# Altium PCB PlacaAudio.PcbDoc
Units mm, origin at the board's own origin, x right, y up, seen from the top; angles counter-clockwise.
Board outline 100 x 50 mm, 2 copper layers (Top Layer, Bottom Layer); 37 components, 21 nets, 89 pads, 18 vias.
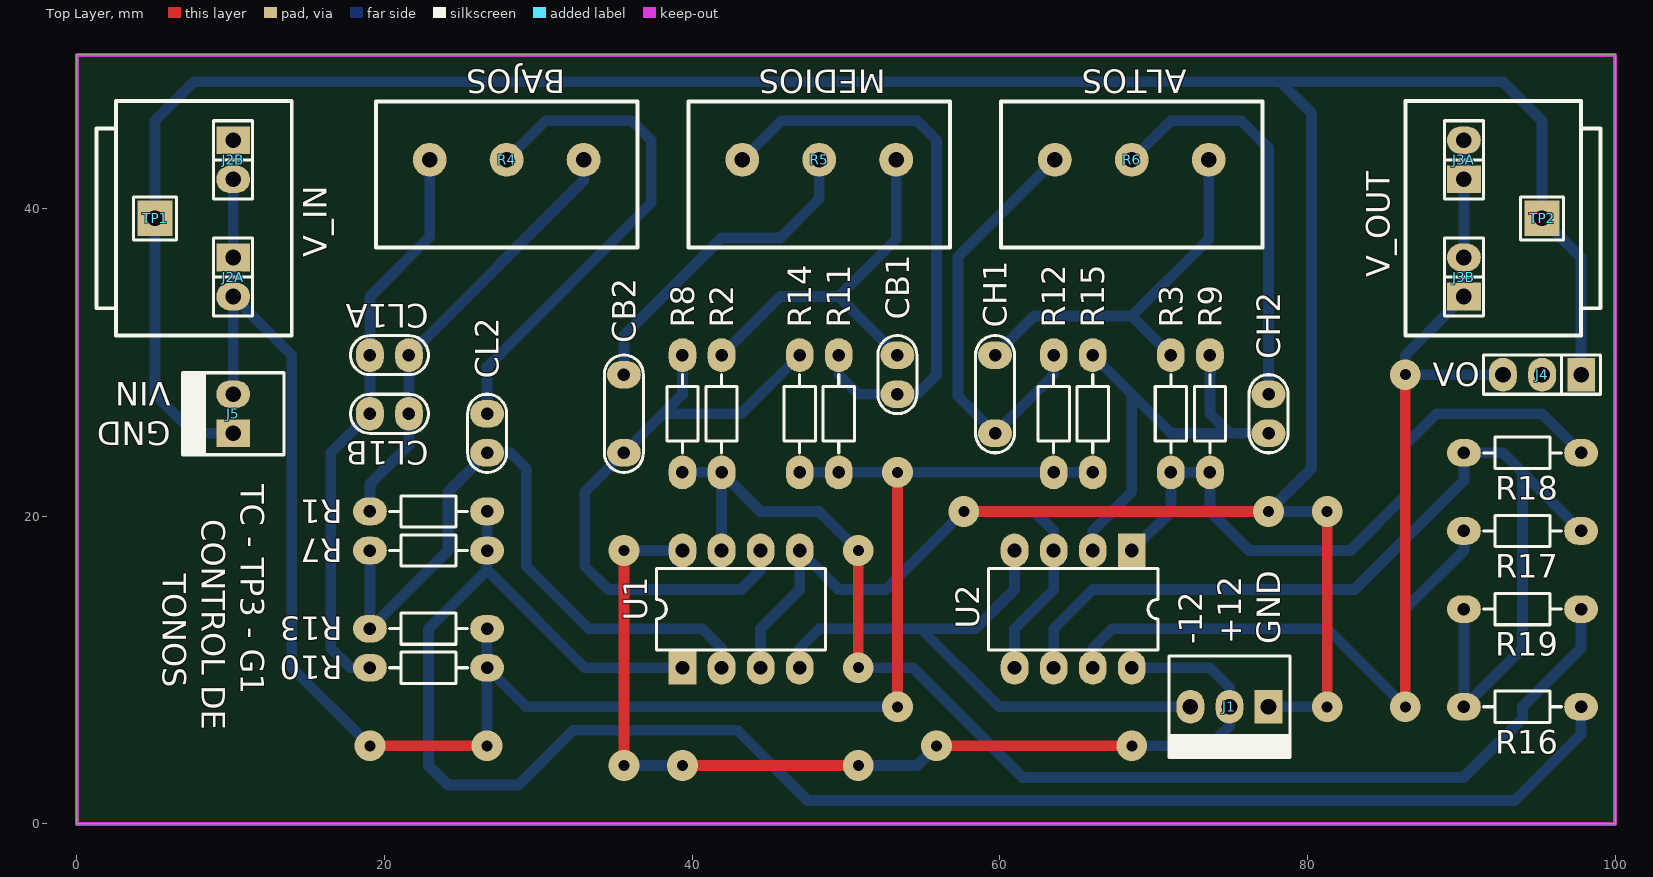
[diagram p0: Top Layer view]
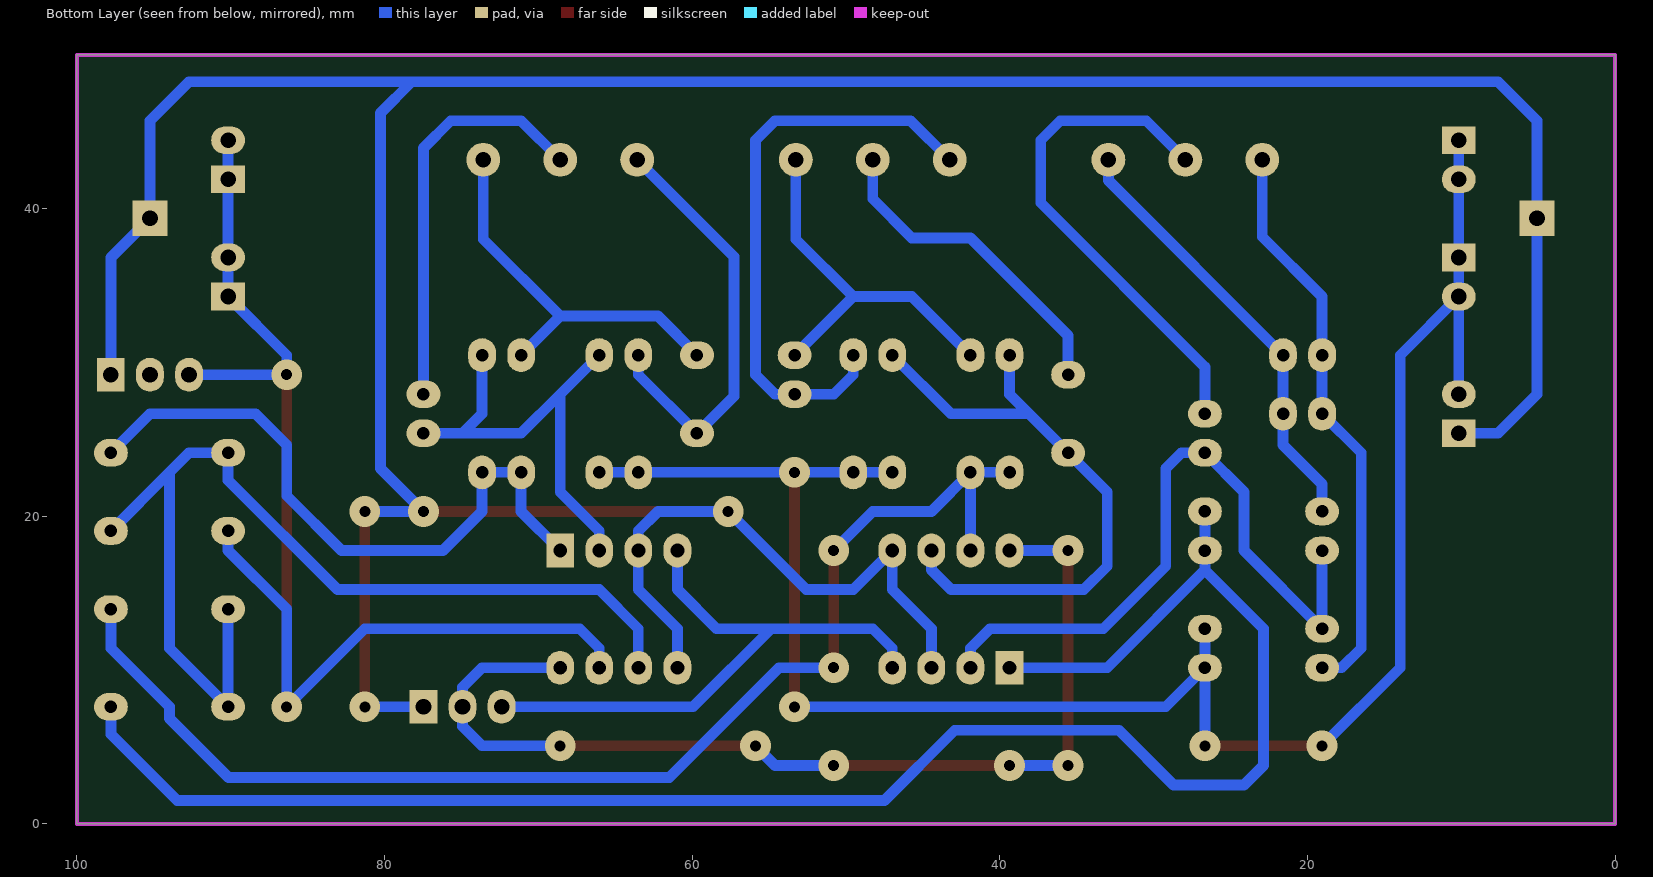
[diagram p1: Bottom Layer view, seen from below]
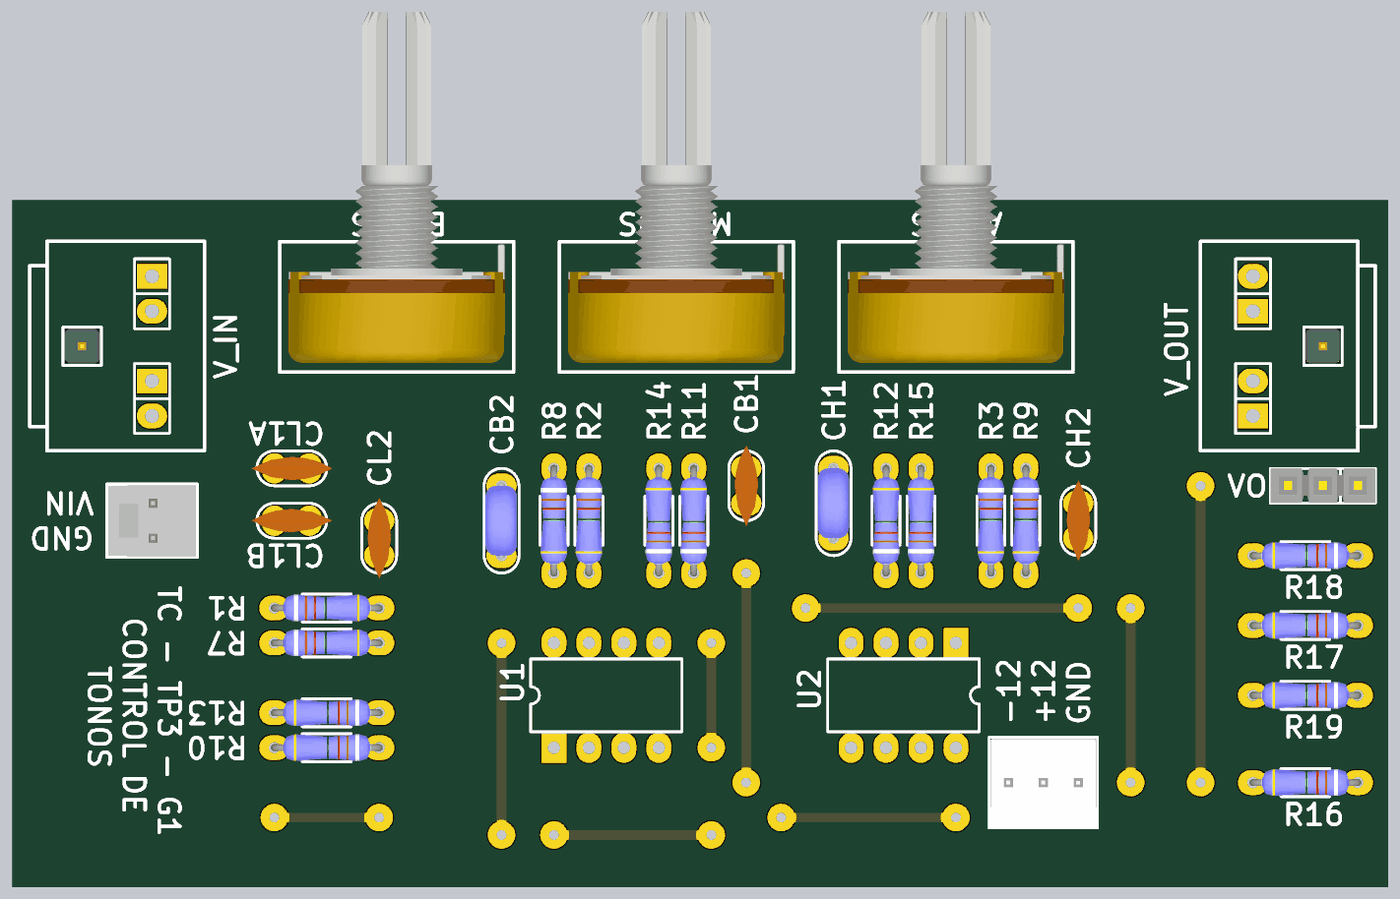
[diagram p2: 3D render of the assembled board from above, using the file's embedded part models]

## Layer stack, top to bottom
Top Solder: solder mask 0.0102, Solder Resist, Dk 3.5
Top Layer: signal copper 0.0356
Dielectric 1: dielectric 0.32, FR-4, Dk 4.8
Bottom Layer: signal copper 0.0356
Bottom Solder: solder mask 0.0102, Solder Resist, Dk 3.5

## Board outline
0,0 0,50 100,50 100,0

## Design rules (kind name [scope] priority, off if disabled: settings)
Clearance [All] p1: gap=0.7
PolygonConnect [All] p1: connectstyle=Relief reliefconductorwidth=0.254 reliefentries=4 polygonreliefangle="90 Angle" airgapwidth=0.254
RoutingVias [All] p1: holewidth=0.711 width=2 viastyle="Through Hole" minholewidth=0.711 minwidth=2 maxholewidth=0.711 maxwidth=2
SolderMaskExpansion [All] p1: expansion=0.102
Width [All] p1: maxlimit=0.7 minlimit=0.7 preferedwidth=0.7
30 further rules are at their usual default settings.

## Components (designator, comment, footprint, x,y, rotation, side; value= is the part's Value field where it differs from the comment)
CB1 "100n" CAP100 53.34,29.21 r270 top
CB2 "10n" CAP200 35.56,26.67 r270 top
CH1 "10n" CAP200 59.69,27.94 r270 top
CH2 "1n" CAP100 77.47,26.67 r270 top
CL1A "330n" CAP100 20.32,30.48 r180 top
CL1B "680n" CAP100 20.32,26.67 r0 top
CL2 "100n" CAP100 26.67,25.4 r270 top
J1 "FUENTE" MOLEX3 77.47,7.62 r180 top
J2A "AUDIO_INA" SIP2 10.16,35.56 r270 top
J2B "AUDIO_INB" SIP2 10.16,43.18 r270 top
J3A "AUDIO_OUTA" SIP2 90.17,43.18 r90 top
J3B "AUDIO_OUTB" SIP2 90.17,35.56 r90 top
J4 "VO_PIN" SIP3 95.25,29.21 r180 top
J5 "VIN_TEST" MOLEX2 10.16,25.4 r90 top
R1 "560" RES300 19.05,20.32 r0 top
R2 "560" RES300 41.91,30.48 r270 top
R3 "560" RES300 71.12,30.48 r270 top
R4 "10K" POTENCIOMETRO 27.94,43.18 r180 top
R5 "10K" POTENCIOMETRO 48.26,43.18 r180 top
R6 "10K" POTENCIOMETRO 68.58,43.18 r180 top
R7 "100K" RES300 19.05,17.78 r0 top
R8 "100K" RES300 39.37,30.48 r270 top
R9 "100K" RES300 73.66,30.48 r270 top
R10 "560" RES300 26.67,10.16 r180 top
R11 "560" RES300 49.53,22.86 r90 top
R12 "560" RES300 63.5,22.86 r90 top
R13 "100K" RES300 26.67,12.7 r180 top
R14 "100K" RES300 46.99,22.86 r90 top
R15 "100K" RES300 66.04,22.86 r90 top
R16 "2.7K" RES300 97.79,7.62 r180 top
R17 "1.5K" RES300 97.79,19.05 r180 top
R18 "2.7K" RES300 97.79,24.13 r180 top
R19 "2.7K" RES300 97.79,13.97 r180 top
TP1 "IN_GND" TPTH 5.08,39.37 r90 top
TP2 "OUT_GND" TPTH 95.25,39.37 r270 top
U1 "TL082ACN" DIP8 43.18,13.97 r0 top
U2 "TL082ACN" DIP8 64.77,13.97 r180 top

## Footprints (in the part's own frame and the unit in brackets; to place one, negate y for a bottom-side part, rotate by r counter-clockwise, add the part's x,y. Pads: shape width x height; smd on the part's side, far side on the other; paste and mask are expansions set on the pad)
CAP100 [mm]
  oval 1.8x2.2 hole 0.813: 1(-1.27,0) 2(1.27,0)
  silkscreen extent -2.54,-1.27 2.54,1.27, body extent -2.92,-0.84 2.92,0.86, height 6.12
CAP200 [mm]
  oval 1.8x2.2 hole 0.813: 1(-2.54,0) 2(2.54,0)
  silkscreen extent -3.81,-1.27 3.81,1.27, body extent -2.79,-1.17 2.79,1.12, height 6.24
DIP8 [mm] "DIP; 8 Leads; Row Spacing 7.62 mm; Pitch 2.54 mm"
  rect 1.8x2.2 hole 0.9: 1(-3.81,-3.81)
  oval 1.8x2.2 hole 0.9: 2(-1.27,-3.81) 3(1.27,-3.81) 4(3.81,-3.81) 5(3.81,3.81) 6(1.27,3.81) 7(-1.27,3.81) 8(-3.81,3.81)
  silkscreen extent -5.5,-2.65 5.5,2.65
MOLEX2 [mm]
  rect 1.8x2.2 hole 1.016: 1(0,0)
  oval 1.8x2.2 hole 1.016: 2(2.54,0)
  silkscreen extent -1.4,-3.3 3.94,3.3, body extent -1.27,-3.17 3.81,3.18, height 10.74
MOLEX3 [mm]
  rect 1.8x2.2 hole 1.016: 1(0,0)
  oval 1.8x2.2 hole 1.016: 2(2.54,0) 3(5.08,0)
  silkscreen extent -1.4,-3.3 6.48,3.3, body extent -1.27,-3.17 6.35,3.18, height 10.74
POTENCIOMETRO [mm]
  round 2.2 hole 1: 1(-5,0) 2(0,0) 3(5,0)
  silkscreen extent -8.5,-3.8 8.5,5.7, body extent -7.87,-20.53 7.87,5.03, height 20.12
RES300 [mm]
  oval 2.2x1.8 hole 0.813: 1(0,0) 2(7.62,0)
  silkscreen extent 1.27,-1.02 6.35,1.02, body extent -0.25,-0.97 7.87,0.97, height 2.01
SIP2 [mm]
  rect 1.8x2.2 hole 1.016: 1(-1.27,0)
  oval 1.8x2.2 hole 1.016: 2(1.27,0)
  silkscreen extent -2.54,-1.27 2.54,1.27
SIP3 [mm]
  rect 1.8x2.2 hole 1.016: 1(-2.54,0)
  oval 1.8x2.2 hole 1.016: 2(0,0) 3(2.54,0)
  silkscreen extent -3.81,-1.27 3.81,1.27, body extent -3.81,-1.3 3.81,1.24, height 8.38
TPTH [mm]
  rect 2.3x2.3 hole 1.016: 1(0,0)
  silkscreen extent -1.4,-1.4 1.4,1.4, body extent -1.27,-1.27 1.27,1.27, height 6.04

## Part data
CB1 CB2 CH1 CH2 CL1A CL1B CL2: library part CAP
J1: library part MOLEX3
J2A J2B J3A J3B: library part CON2
J4: library part CON3
J5: library part MOLEX2
R1 R2 R3 R7 R8 R9 R10 R11 R12 R13 R14 R15 R16 R17 R18 R19: library part RES
R4 R5 R6: library part POTENCIOMETRO
TP1 TP2: library part TP
U1 U2: "General-Purpose J-FET Dual Operational Amplifier"

## Via types
v1: diameter 2, hole 0.711, Top Layer to Bottom Layer, 18 vias

## Nets (pads, with @x,y where several pads share a name; then routed paths per layer and width w, separated by ;. In a path a pad name is that pad's centre, name@x,y a point inside that pad or via, vN(x,y) a via of type N, cw(c..) or ccw(c..) an arc to the next point about the centre after c; other vN are vias at no path point)
+12: J1.2 U1.8 U2.8 | length 67.6
  Top Layer w0.7: v1(35.56,3.81) v1(35.56,17.78) ; v1(39.37,3.81) v1(50.8,3.81) ; v1(55.88,5.08) v1(68.58,5.08)
  Bottom Layer w0.7: v1(35.56,3.81) v1(39.37,3.81) ; v1(35.56,17.78) U1.8 ; v1(50.8,3.81) 54.61,3.81 v1(55.88,5.08) ; v1(68.58,5.08) 73.66,5.08 74.93,6.35 J1.2 74.93,8.89 73.66,10.16 U2.8
-12: J1.3 U1.4 U2.4 | length 39
  Bottom Layer w0.7: U1.4 46.99,11.43 48.26,12.7 54.864,12.7 ; U2.4 60.96,15.24 58.42,12.7 54.864,12.7 ; J1.3 59.944,7.62 54.864,12.7
GND: J1.1 J4.1 J5.1 TP1.1 TP2.1 U1.3 U1.5 U2.3 U2.5 | length 242.6
  Top Layer w0.7: v1(57.658,20.32) v1(77.47,20.32) ; v1(81.28,7.62) v1(81.28,20.32)
  Bottom Layer w0.7: J5.1 7.62,25.4 5.08,27.94 TP1.1 5.08,45.72 7.62,48.26 78.232,48.26 ; U1.3 44.45,12.7 46.99,15.24 U1.5 49.53,15.24 52.578,15.24 v1(57.658,20.32) 62.23,20.32 63.5,19.05 U2.3 63.5,15.24 60.96,12.7 U2.5 ; J1.1 v1(81.28,7.62) ; v1(81.28,20.32) v1(77.47,20.32) 80.264,23.114 80.264,46.228 78.232,48.26 ; J4.1 97.79,36.83 TP2.1 95.25,45.72 92.71,48.26 78.232,48.26
NetCB1_1: CB1.1 R2.1 R5.1 | length 25
  Bottom Layer w0.7: R2.1 45.72,34.29 49.53,34.29 ; R5.1 53.26,38.02 49.53,34.29 ; CB1.1 49.53,34.29
NetCB1_2: CB1.2 R5.3 R11.2 | length 38.1
  Bottom Layer w0.7: R5.3 45.8,45.72 54.61,45.72 55.88,44.45 55.88,29.21 54.61,27.94 CB1.2 50.8,27.94 49.53,29.21 R11.2
NetCB2_1: CB2.1 R5.2 | length 21.5
  Bottom Layer w0.7: CB2.1 35.56,31.75 41.91,38.1 45.72,38.1 48.26,40.64 R5.2
NetCB2_2: CB2.2 R8.1 R14.2 U1.6 | length 40.7
  Bottom Layer w0.7: R8.1 39.37,27.94 38.1,26.67 ; U1.6 44.45,16.51 43.18,15.24 34.544,15.24 33.02,16.764 33.02,21.59 CB2.2 38.1,26.67 ; R14.2 43.18,26.67 38.1,26.67
NetCH1_1: CH1.1 R3.1 R6.1 | length 25.8
  Bottom Layer w0.7: CH1.1 62.23,33.02 68.58,33.02 ; R3.1 68.58,33.02 ; R6.1 73.58,38.02 68.58,33.02
NetCH1_2: CH1.2 R6.3 R12.2 | length 28
  Bottom Layer w0.7: R12.2 63.5,29.21 CH1.2 57.28,27.81 57.28,36.88 R6.3
NetCH2_1: CH2.1 R6.2 | length 26.7
  Bottom Layer w0.7: R6.2 71.12,45.72 75.692,45.72 77.47,43.942 CH2.1
NetCH2_2: CH2.2 R9.1 R15.2 U2.2 | length 30.4
  Bottom Layer w0.7: U2.2 66.04,19.05 68.58,21.59 68.58,27.94 ; R15.2 68.58,27.94 ; R9.1 73.66,26.67 74.93,25.4 ; CH2.2 74.93,25.4 ; 68.58,27.94 71.12,25.4 74.93,25.4
NetCL1A_1: CL1A.1 CL1B.2 R1.1 R4.1 | length 28.4
  Bottom Layer w0.7: R1.1 19.05,22.098 21.59,24.638 CL1B.2 CL1A.1@21.59,30.226 ; CL1A.1 32.94,41.83 R4.1
NetCL1A_2: CL1A.2 CL1B.1 R4.3 R10.2 | length 37.8
  Bottom Layer w0.7: R10.2 17.78,10.16 16.51,11.43 16.51,24.13 CL1B.1 CL1A.2 19.05,34.29 22.94,38.18 R4.3@22.94,42.926 ; R4.3 R4.3@22.94,42.926 ; R4.3@23.194,43.18 R4.3@22.94,42.926
NetCL2_1: CL2.1 R4.2 | length 33.2
  Bottom Layer w0.7: CL2.1 26.67,29.718 37.338,40.386 37.338,44.45 36.068,45.72 30.48,45.72 R4.2
NetCL2_2: CL2.2 R7.1 R13.2 U1.2 | length 45.2
  Bottom Layer w0.7: R7.1 R13.2 24.13,17.78 24.13,21.59 CL2.2 28.194,24.13 29.21,23.114 29.21,16.764 33.274,12.7 40.64,12.7 41.91,11.43 U1.2
NetR16_2: R16.2 R17.1 R18.2 R19.2 U2.6 | length 67.9
  Bottom Layer w0.7: U2.6 63.5,12.7 66.04,15.24 83.058,15.24 90.17,22.352 R18.2 92.71,24.13 93.98,22.86 ; R19.2 R16.2 93.98,11.43 93.98,22.86 ; R17.1 93.98,22.86
V_IN: J2A.1 J2A.2 J2B.1 J2B.2 J5.2 R10.1 R11.1 R12.1 R13.1 R14.1 R15.1 | length 126.7
  Top Layer w0.7: v1(19.05,5.08) v1(26.67,5.08) ; v1(53.34,7.62) v1(53.34,22.86)
  Bottom Layer w0.7: J5.2 J2A.2 ; J2B.1 J2B.2 J2A.1 J2A.2 ; v1(19.05,5.08) 13.97,10.16 13.97,30.48 J2A.2 ; v1(26.67,5.08) R10.1 ; R13.1 R10.1 ; R14.1 R11.1 v1(53.34,22.86) R12.1 R15.1 ; v1(53.34,7.62) 29.21,7.62 R10.1
VO: J3A.1 J3A.2 J3B.1 J3B.2 J4.3 R17.2 U2.7 | length 82
  Top Layer w0.7: v1(86.36,7.62) v1(86.36,29.21)
  Bottom Layer w0.7: U2.7 66.04,11.43 67.31,12.7 81.28,12.7 v1(86.36,7.62) 86.36,13.97 90.17,17.78 R17.2 ; J3A.2 J3A.1 J3B.2 J3B.1 86.36,30.48 v1(86.36,29.21) J4.3
VO_BP: R2.2 R8.2 R19.1 U1.7 | length 82.6
  Top Layer w0.7: v1(50.8,10.16) v1(50.8,17.78)
  Bottom Layer w0.7: R8.2 R2.2 ; U1.7 R2.2 ; v1(50.8,10.16) 54.356,10.16 61.486,3.03 65.296,3.03 90.152,3.03 93.98,6.858 93.98,7.62 97.79,11.43 R19.1 ; v1(50.8,17.78) 48.26,20.32 44.45,20.32 R2.2
VO_HP: R3.2 R9.2 R18.1 U2.1 | length 43.1
  Bottom Layer w0.7: U2.1 71.12,20.32 R3.2 R9.2 73.66,20.32 76.2,17.78 82.804,17.78 86.36,21.336 86.36,24.638 88.392,26.67 95.25,26.67 R18.1
VO_LP: R1.2 R7.2 R16.1 U1.1 | length 115.8
  Bottom Layer w0.7: R1.2 R7.2 26.67,16.51 ; U1.1 33.02,10.16 26.67,16.51 ; R16.1 97.79,5.842 93.472,1.524 51.308,1.524 47.498,1.524 42.926,6.096 32.258,6.096 28.702,2.54 24.13,2.54 22.86,3.81 22.86,12.7 26.67,16.51
pads on no net: J4.2

## Keep-outs
Keep-Out Layer:
  the board outline again, w0.254

## Silkscreen, mask and mechanical layers (free items; w line width, h text height)
Top Overlay:
  lines w0.254: 2.54,33.528 1.27,33.528 1.27,45.212 2.54,45.212 ; 97.79,33.528 99.06,33.528 99.06,45.212 97.79,45.212 ; 2.54,31.75 13.97,31.75 13.97,46.99 2.54,46.99 2.54,31.75 ; 86.36,31.75 86.36,46.99 97.79,46.99 97.79,31.75 86.36,31.75
  text "BAJOS" at 31.75,49.022 h1.52 r180
  text "MEDIOS" at 52.578,49.022 h1.52 r180
  text "ALTOS" at 72.136,49.022 h1.52 r180
  text "V_IN" at 16.256,36.83 h1.52 r90
  text "V_OUT" at 85.344,35.56 h1.52 r90
  text "VIN" at 6.096,28.702 h1.52 r180
  text "VO" at 88.138,28.448 h1.52
  text "GND" at 6.096,26.162 h1.52 r180
  text "TC - TP3 - G1" at 10.668,22.098 h1.52 r270
  text "CONTROL DE" at 8.128,19.812 h1.52 r270
  text "TONOS" at 5.588,16.256 h1.52 r270
  text "-12" at 73.152,11.684 h1.52 r90
  text "+12" at 75.692,11.684 h1.52 r90
  text "GND" at 78.232,11.684 h1.52 r90